# Altium PCB PCB_Pathfinder_2026-03-24.pcbdoc
Units mil, origin at the board's own origin, x right, y up, seen from the top; angles counter-clockwise.
Board outline 4649.99 x 2895 mil, 2 copper layers (Top Layer, Bottom Layer); 10 components, 19 nets, 43 pads, 1 vias.
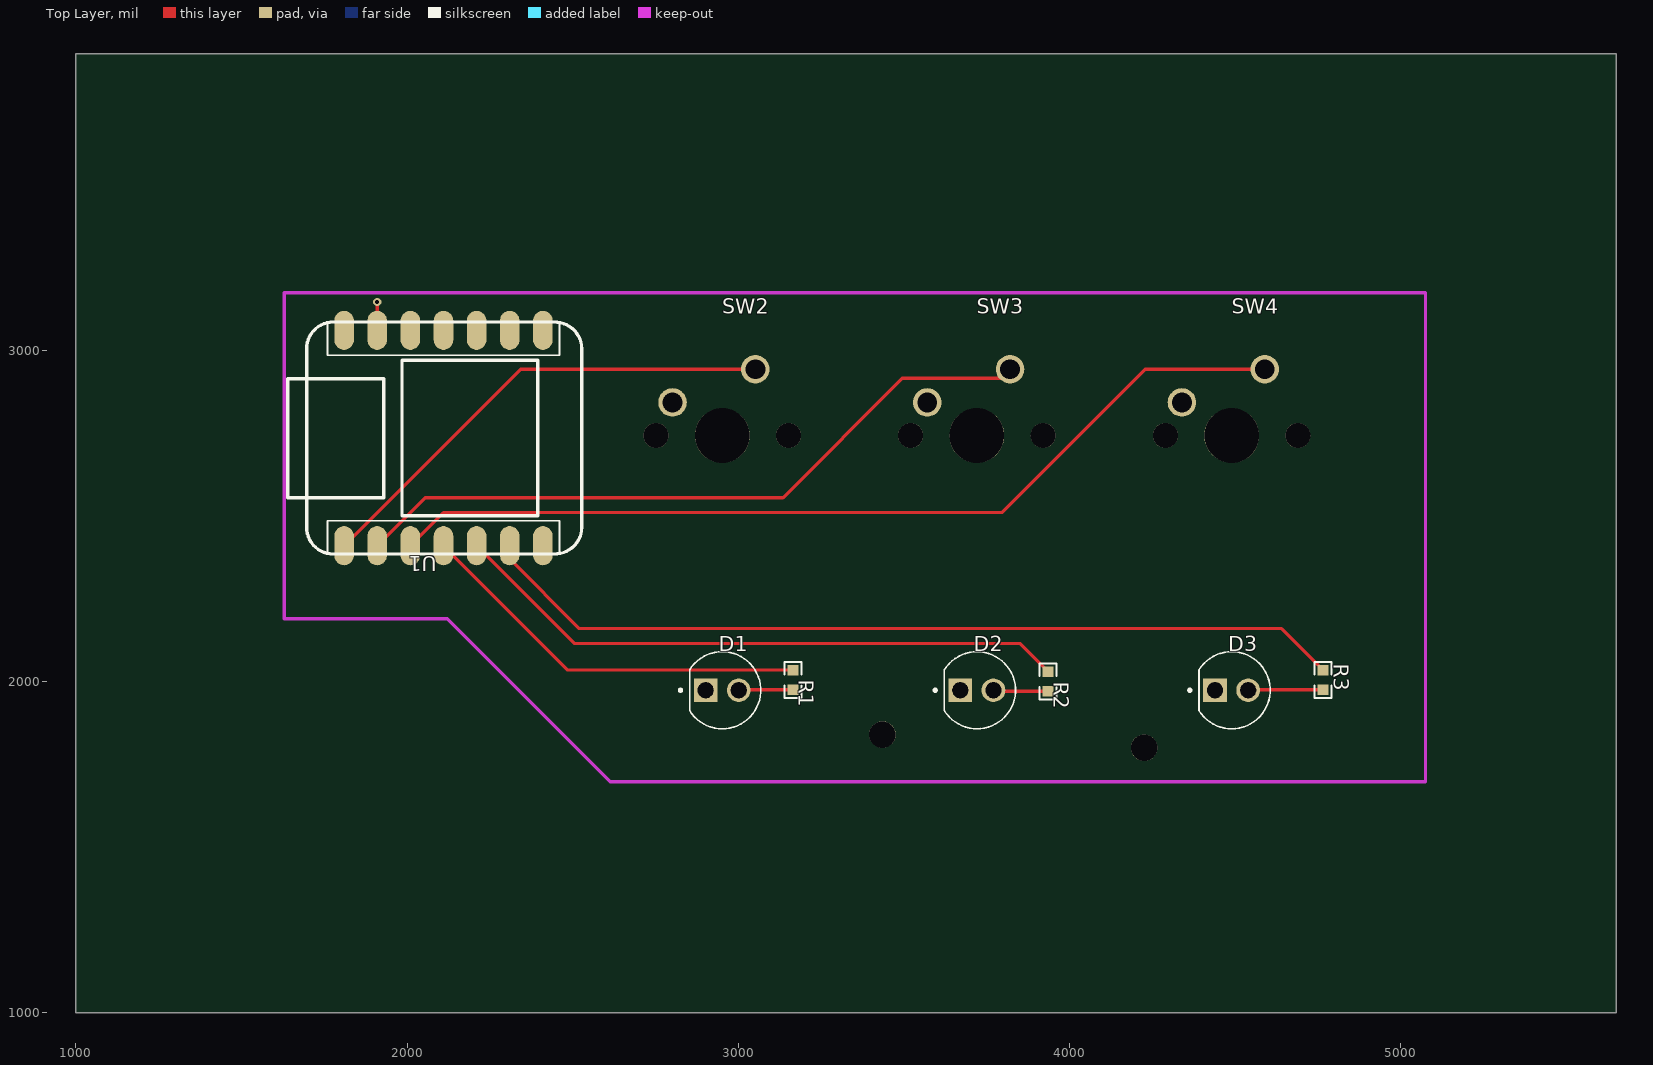
[diagram p0: Top Layer view]
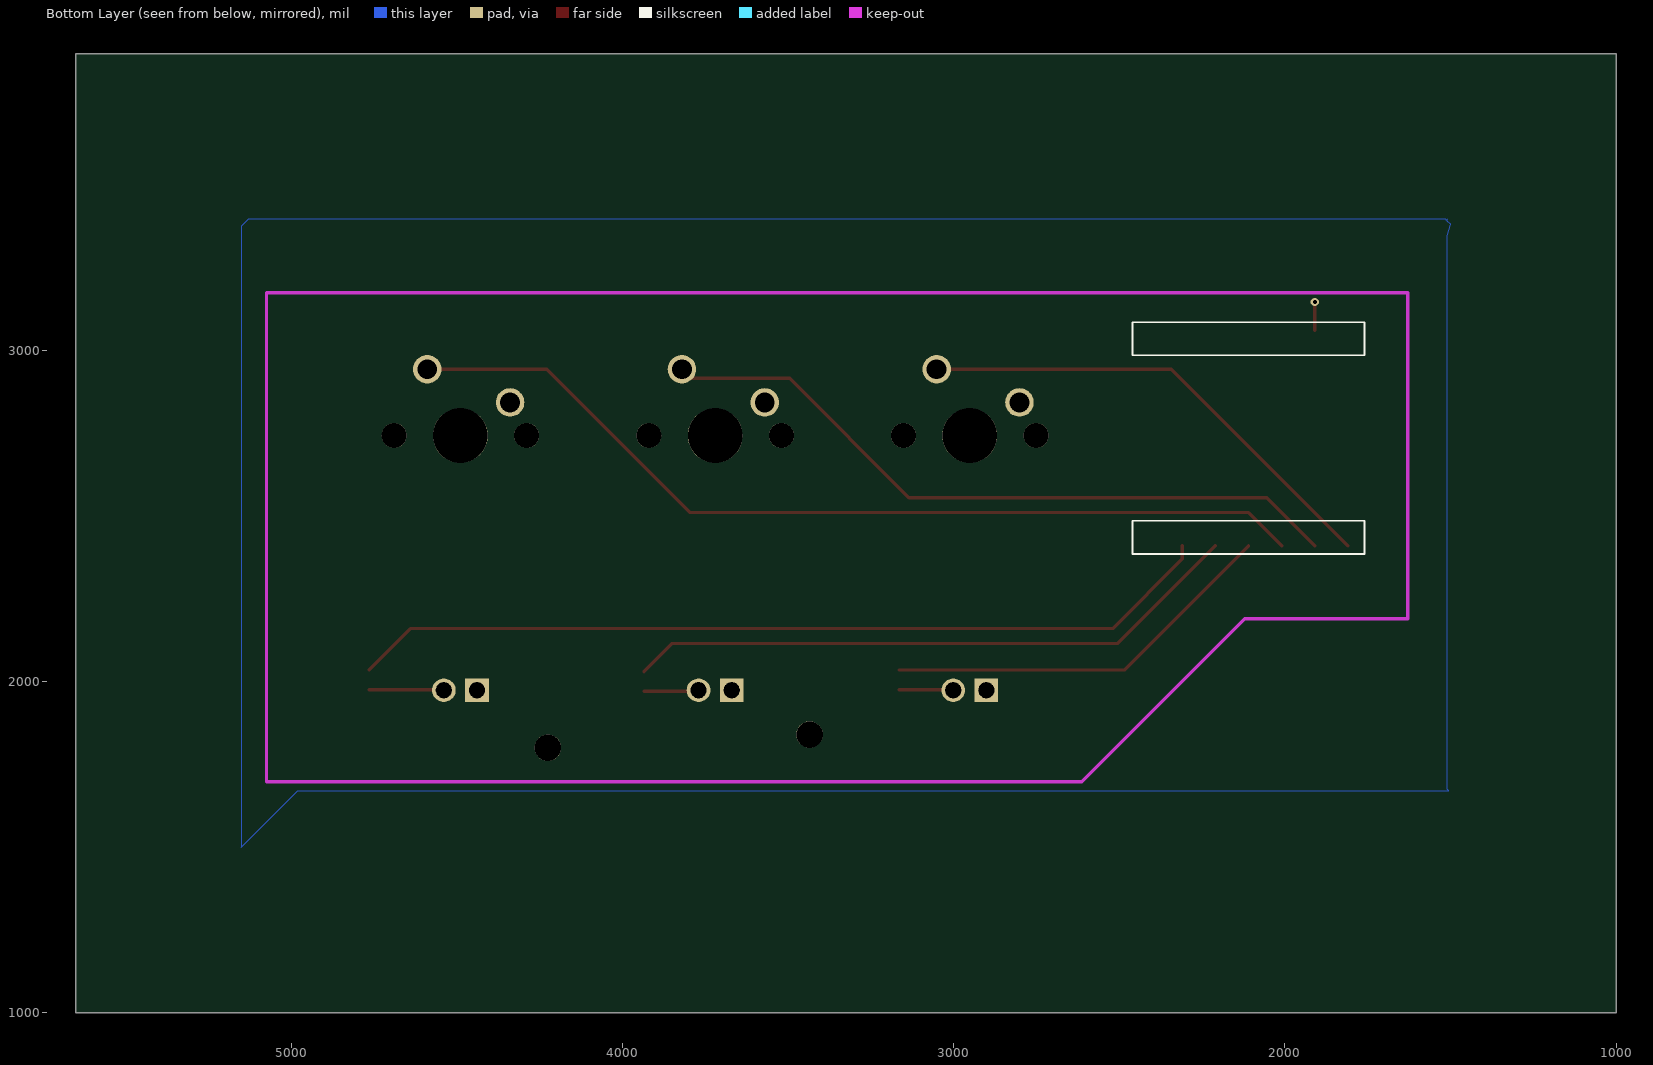
[diagram p1: Bottom Layer view, seen from below]

## Layer stack, top to bottom
Top Layer: signal copper (thickness not stored)
Dielectric: dielectric 12.6, FR-4, Dk 4.8
Bottom Layer: signal copper (thickness not stored)

## Board outline
5649.99,1000 1000,1000 1000,3895 5649.99,3895

## Components (designator, comment, footprint, x,y, rotation, side; value= is the part's Value field where it differs from the comment)
D1 "L08R5000Q1" LEDRD254W57D500H1070 2951.34,1973.78 r0 top
D2 "L08R5000Q1" LEDRD254W57D500H1070 3720.11,1973.78 r0 top
D3 "L08R5000Q1" LEDRD254W57D500H1070 4488.89,1973.78 r0 top
R1 "1k" R0603 3165,2005 r270 top
R2 "1k" R0603 3935,2000 r270 top
R3 "1k" R0603 4764.99,2005 r270 top
SW2 "CHERRY MX SWITCH SIMPLE" CHERRY_MX_1U_SQ 2951.34,2742.56 r0 top
SW3 "CHERRY MX SWITCH SIMPLE" CHERRY_MX_1U_SQ 3720.11,2742.56 r0 top
SW4 "CHERRY MX SWITCH SIMPLE" CHERRY_MX_1U_SQ 4488.89,2742.56 r0 top
U1 "SEEED XIAO RP2040" "XIAO RP2040 SMT" 2110,2735 r180 top

## Footprints (in the part's own frame and the unit in brackets; to place one, negate y for a bottom-side part, rotate by r counter-clockwise, add the part's x,y. Pads: shape width x height; smd on the part's side, far side on the other; paste and mask are expansions set on the pad)
CHERRY_MX_1U_SQ [mil]
  round 86 hole 60 paste+0 mask+4: 1(-150,100) 2(100,200)
  round 75 hole 75 unplated paste+0: ""(-200,0) ""(200,0)
  round 165 hole 165 unplated paste+0: ""(0,0)
LEDRD254W57D500H1070 [mil]
  round 71.46 hole 47.64 slot 47.84 at 0 deg paste+0 mask+2: A(50,0)
  rect 71.46x71.46 hole 47.64 slot 47.84 at 0 deg paste+0 mask+2: C(-50,0)
  silkscreen extent -130,-116 116,116
R0603 [mil]
  rect 31.75x34.02 smd paste-3937.01 mask+2: 1(-29.65,0) 2(29.65,0)
  silkscreen extent -55,-26 55,26
"XIAO RP2040 SMT" [mm]
  oval 1.5x3 smd paste+0 mask+0.051: 0(7.62,8.255) 1(5.08,8.255) 2(2.54,8.255) 3(0,8.255) 4(-2.54,8.255) 5(-5.08,8.255) 6(-7.62,8.255) 7(-7.62,-8.255) 8(-5.08,-8.255) 9(-2.54,-8.255) 10(0,-8.255) 11(2.54,-8.255) 12(5.08,-8.255) 13(7.62,-8.255)
  silkscreen extent -10.61,-8.89 11.94,8.89

## Free pads (board coordinates)
  round 80 hole 80 unplated paste+0: ""(3434.99,1840) ""(4224.99,1800)

## Via types
v1: diameter 24.41, hole 12.2, Top Layer to Bottom Layer, tented both sides, 1 vias

## Nets (pads, with @x,y where several pads share a name; then routed paths per layer and width w, separated by ;. In a path a pad name is that pad's centre, name@x,y a point inside that pad or via, vN(x,y) a via of type N, cw(c..) or ccw(c..) an arc to the next point about the centre after c; other vN are vias at no path point)
BUTTON1: SW2.2 U1.0 | length 1461.9
  Top Layer w10: U1.0 2342.56,2942.56 SW2.2
BUTTON2: SW3.2 U1.1 | length 2130.7
  Top Layer w10: U1.1 2055,2555 3135,2555 3495,2915 3792.55,2915 SW3.2
BUTTON3: SW4.2 U1.2 | length 2799.5
  Top Layer w10: U1.2 2110,2510 3794.99,2510 4227.55,2942.56 SW4.2
GND: D1.C D2.C D3.C SW2.1 SW3.1 SW4.1 U1.12 | length 85
  Top Layer w10: U1.12 v1(1910,3145)
LED1: R1.1 U1.3 | length 1210.5
  Top Layer w10: U1.3 2485.34,2034.66 R1.1
LED2: R2.1 U1.4 | length 1882.5
  Top Layer w10: U1.4 2505,2115 3849.66,2115 R2.1
LED3: R3.1 U1.5 | length 2633.9
  Top Layer w10: U1.5 2310,2370 2520,2160 4639.65,2160 R3.1
R1_2: D1.A R1.2 | length 164.3
  Top Layer w10: D1.A 3002.9,1975.34 R1.2
R2_2: D2.A R2.2 | length 166.3
  Top Layer w10: D2.A 3773.55,1970.34 R2.2
R3_2: D3.A R3.2 | length 226.7
  Top Layer w10: D3.A 4540.45,1975.34 R3.2
S$1953: 
S$1972: 
U1_6: U1.6
U1_7: U1.7
U1_8: U1.8
U1_9: U1.9
U1_10: U1.10
U1_11: U1.11
U1_13: U1.13
pads on no net: SW2. SW3. SW4.

## Polygon pours and split planes (outlines as drawn)
GND on Bottom Layer (solid): 5149.99,3375 5149.99,1500 4979.99,1670 1505,1670 1510,1675 1510,3345.77 1500,3380 1510,3390 1510,3395 1512.5,3392.5 1515,3395 5129.99,3395 5149.99,3375